# Altium PCB 00Key(1).PcbDoc (part 3 of 4)
Units mm, origin at the board's own origin, x right, y up, seen from the top; angles counter-clockwise.
Board outline 304.8 x 170.81 mm, 2 copper layers (F.Cu, B.Cu); 268 components, 236 nets, 1532 pads, 61 vias.
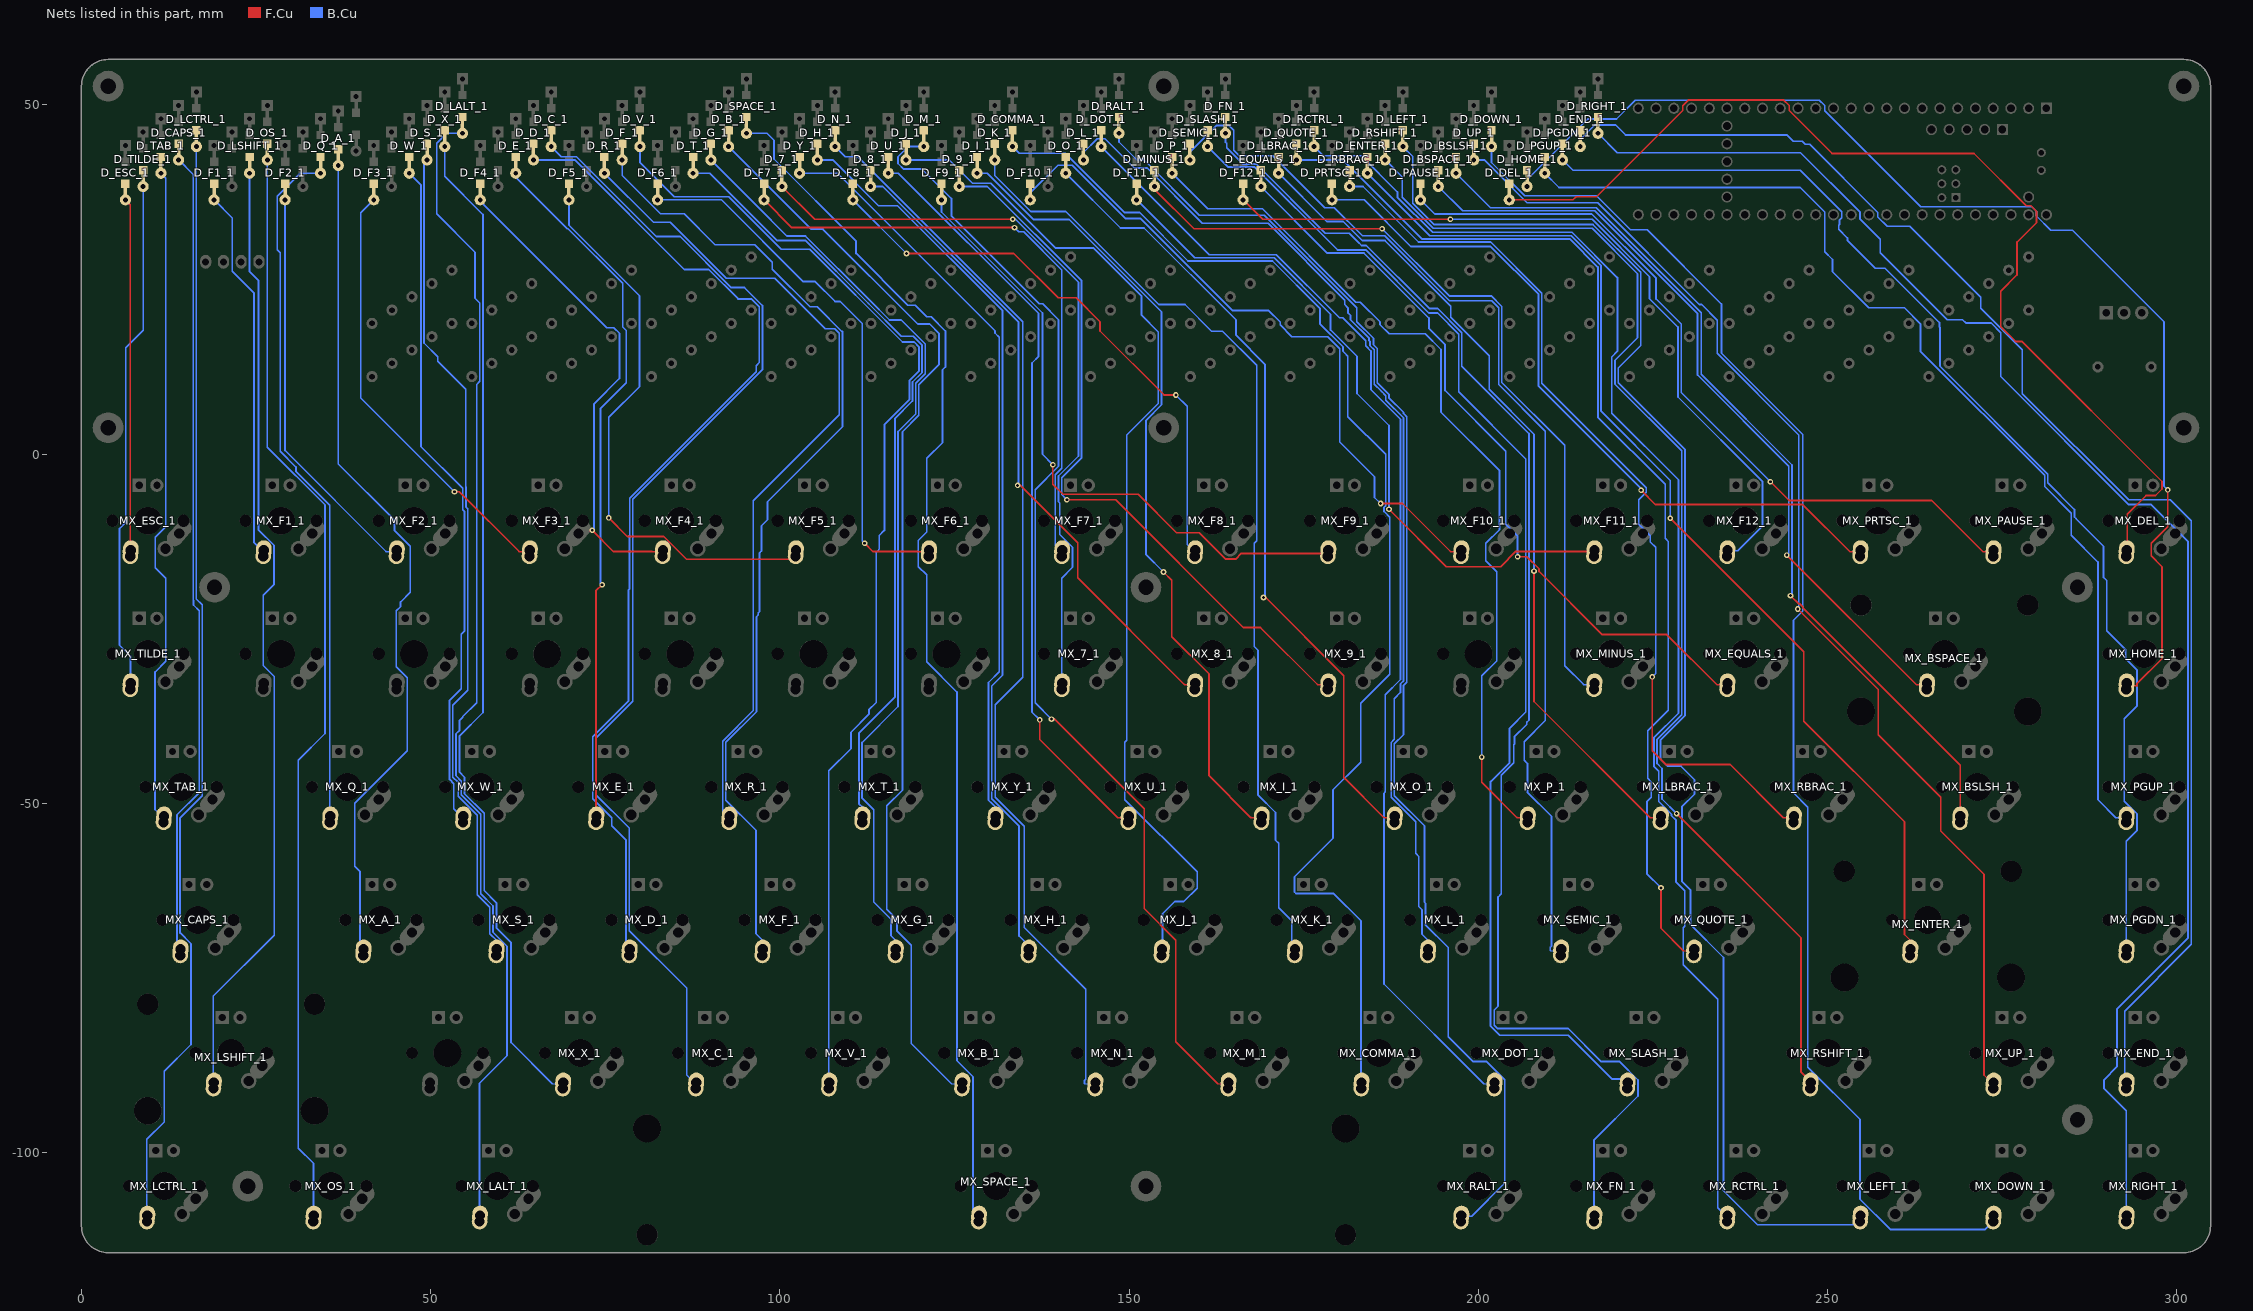
[diagram p3: the nets of this part, all layers, seen from the top]

## Via types
v1: diameter 0.8, hole 0.4, F.Cu to B.Cu, tented both sides, 61 vias

## Nets (pads, with @x,y where several pads share a name; then routed paths per layer and width w, separated by ;. In a path a pad name is that pad's centre, name@x,y a point inside that pad or via, vN(x,y) a via of type N, cw(c..) or ccw(c..) an arc to the next point about the centre after c; other vN are vias at no path point) (continued)
Net-(D_7_1-Pad2): D_7_1.2 MX_7_1.2 | length 111.5
  F.Cu w0.25: D_7_1.2@100.266,40.652 D_7_1.2@100.266,39.528 D_7_1.2@100.266,38.328 104.962,33.632 v1(133.336,33.632)
  B.Cu w0.25: v1(133.336,33.632) 133.717,33.632 142.73,24.619 142.73,-0.253 139.876,-3.107 139.876,-6.789 140.069,-6.983 140.069,-11.487 141.881,-13.299 141.881,-16.174 140.327,-17.729 140.327,-31.436 140.477,-31.586 140.374,-33.075 140.374,-33.614 MX_7_1.2@140.334,-33.654
Net-(D_8_1-Pad2): D_8_1.2 MX_8_1.2 | length 95.7
  F.Cu w0.25: D_8_1.2@112.966,38.328 D_8_1.2@112.966,39.528 D_8_1.2@112.966,40.652 ; v1(134.017,-4.456) 134.423,-4.456 142.615,-12.647 142.615,-17.688 157.896,-32.969 159.424,-33.075 159.384,-33.115 MX_8_1.2@159.384,-33.654
  B.Cu w0.25: D_8_1.2@112.966,38.328 114.724,38.328 134.16,18.891 134.16,-4.312 v1(134.017,-4.456)
Net-(D_9_1-Pad2): D_9_1.2 MX_9_1.2 | length 107.2
  F.Cu w0.25: D_9_1.2@125.666,38.328 D_9_1.2@125.666,39.528 D_9_1.2@125.666,40.652 ; v1(141.078,-6.512) 148.043,-6.512 166.329,-24.798 168.775,-24.798 176.946,-32.969 178.474,-33.075 178.434,-33.115 MX_9_1.2@178.434,-33.654
  B.Cu w0.25: D_9_1.2@125.666,38.328 129.667,38.328 143.18,24.814 143.18,-0.501 140.327,-3.355 140.327,-5.76 v1(141.078,-6.512)
Net-(D_A_1-Pad2): D_A_1.2 MX_A_1.2 | length 124.8
  F.Cu w0.25: D_A_1.2@36.767,41.343 D_A_1.2@36.767,42.543 D_A_1.2@36.767,43.667
  B.Cu w0.25: D_A_1.2@36.767,41.343 36.767,-1.404 44.825,-9.462 44.825,-10.937 47.062,-13.174 47.062,-19.776 45.685,-21.153 45.685,-21.789 45.077,-22.398 45.077,-30.428 46.642,-31.992 46.642,-42.465 39.123,-49.984 39.123,-58.984 39.864,-59.725 39.864,-70.676 40.362,-71.175 40.322,-71.215 MX_A_1.2@40.322,-71.754
Net-(D_B_1-Pad2): D_B_1.2 MX_B_1.2 | length 160
  F.Cu w0.25: D_B_1.2@92.647,44.043 D_B_1.2@92.647,45.243 D_B_1.2@92.647,46.367 ; MX_B_1.2@126.047,-90.804 126.087,-90.764 MX_B_1.2@126.087,-90.225
  B.Cu w0.25: D_B_1.2@92.647,44.043 104.458,32.231 106.145,32.231 119.737,18.639 121.416,18.639 122.78,17.275 122.78,12.863 119.879,9.962 119.879,5.581 117.534,3.236 117.534,-48.097 115.3,-50.331 115.3,-65.129 116.743,-66.572 116.743,-68.234 118.803,-70.294 118.803,-84.363 124.559,-90.119 MX_B_1.2@126.087,-90.225
Net-(D_BSLSH_1-Pad2): D_BSLSH_1.2 MX_BSLSH_1.2 | length 134.3
  F.Cu w0.25: D_BSLSH_1.2@196.786,40.233 D_BSLSH_1.2@196.786,41.433 D_BSLSH_1.2@196.786,42.557 ; v1(244.669,-20.232) 245.862,-21.425 246.011,-21.425 246.436,-21.85 246.436,-21.999 268.962,-44.526 268.962,-50.534 269.065,-50.636 268.962,-52.125 268.962,-52.664 MX_BSLSH_1.2@268.923,-52.704
  B.Cu w0.25: D_BSLSH_1.2@196.786,40.233 201.722,35.297 216.833,35.297 231.888,20.242 231.888,11.458 244.889,-1.543 244.889,-20.012 v1(244.669,-20.232)
Net-(D_BSPACE_1-Pad2): D_BSPACE_1.2 MX_BSPACE_1.2 | length 115.4
  F.Cu w0.25: D_BSPACE_1.2@194.246,38.328 D_BSPACE_1.2@194.246,39.528 D_BSPACE_1.2@194.246,40.652 ; v1(244.146,-14.443) 262.672,-32.969 MX_BSPACE_1.2@264.201,-33.075
  B.Cu w0.25: D_BSPACE_1.2@194.246,38.328 197.727,34.847 216.646,34.847 231.368,20.126 231.368,11.342 244.412,-1.702 244.412,-14.177 v1(244.146,-14.443) ; MX_BSPACE_1.2@264.161,-33.654 264.161,-33.115 MX_BSPACE_1.2@264.201,-33.075
Net-(D_C_1-Pad2): D_C_1.2 MX_C_1.2 | length 169.9
  F.Cu w0.25: D_C_1.2@67.246,44.043 D_C_1.2@67.246,45.243 D_C_1.2@67.246,46.367 ; MX_C_1.2@87.947,-90.804 87.947,-90.265 MX_C_1.2@87.987,-90.225
  B.Cu w0.25: D_C_1.2@67.246,44.043 68.701,42.588 70.861,42.588 82.279,31.171 85.709,31.171 93.022,23.858 94.92,23.858 97.486,21.292 97.486,12.084 78.939,-6.462 78.939,-35.343 73.642,-40.641 73.642,-48.734 78.415,-53.507 78.415,-68.199 86.638,-76.422 86.638,-88.875 MX_C_1.2@87.987,-90.225
Net-(D_CAPS_1-Pad2): D_CAPS_1.2 MX_CAPS_1.2 | length 119
  F.Cu w0.25: D_CAPS_1.2@13.906,42.138 D_CAPS_1.2@13.906,43.338 D_CAPS_1.2@13.906,44.462
  B.Cu w0.25: D_CAPS_1.2@13.906,42.138 15.996,40.048 15.996,-20.907 16.035,-20.946 16.035,-21.583 16.844,-22.392 16.844,-48.451 13.67,-51.624 13.67,-70.676 14.169,-71.175 14.129,-71.215 MX_CAPS_1.2@14.129,-71.754
Net-(D_COMMA_1-Pad2): D_COMMA_1.2 MX_COMMA_1.2 | length 184.8
  F.Cu w0.25: D_COMMA_1.2@133.286,44.043 D_COMMA_1.2@133.286,45.243 D_COMMA_1.2@133.286,46.367 ; MX_COMMA_1.2@183.197,-90.804 183.197,-90.265 MX_COMMA_1.2@183.237,-90.225
  B.Cu w0.25: D_COMMA_1.2@133.286,44.043 134.232,43.097 140.82,43.097 149.295,34.622 151.462,34.622 158.418,27.666 170.517,27.666 177.298,20.885 177.298,18.686 180.598,15.387 180.598,14.75 180.775,14.573 181.299,14.049 181.299,5.391 186.707,-0.017 186.707,-7.348 186.468,-7.588 186.468,-8.188 187.285,-9.005 187.285,-31.518 183.13,-35.673 183.13,-44.102 179.172,-48.059 179.172,-54.97 173.657,-60.486 173.657,-62.679 173.875,-62.897 179.259,-62.897 183.189,-66.828 183.189,-88.585 183.34,-88.736 MX_COMMA_1.2@183.237,-90.225
Net-(D_D_1-Pad2): D_D_1.2 MX_D_1.2 | length 148.3
  F.Cu w0.25: D_D_1.2@64.706,42.138 D_D_1.2@64.706,43.338 D_D_1.2@64.706,44.462
  B.Cu w0.25: D_D_1.2@64.706,42.138 70.592,42.138 86.286,26.444 89.799,26.444 94.002,22.24 95.9,22.24 97.036,21.105 97.036,13.133 96.585,12.683 96.585,11.821 78.489,-6.276 78.489,-11.561 78.448,-11.602 78.448,-19.295 78.298,-19.445 78.298,-35.347 73.191,-40.455 73.191,-49.309 75.927,-52.045 75.927,-53.213 77.964,-55.251 77.964,-70.676 78.462,-71.175 78.422,-71.215 MX_D_1.2@78.422,-71.754
Net-(D_DEL_1-Pad2): D_DEL_1.2 MX_DEL_1.2 | length 155.6
  F.Cu w0.25: D_DEL_1.2@204.406,38.747 D_DEL_1.2@204.406,37.623 D_DEL_1.2@204.406,36.423 213.523,36.423 213.973,36.873 216.899,36.873 229.234,49.208 229.234,49.903 230.033,50.702 243.703,50.702 244.474,49.93 244.474,49.205 250.622,43.058 270.945,43.058 278.443,35.56 279.099,35.56 279.89,34.769 279.89,33.165 277.1,30.375 277.1,25.674 274.774,23.347 274.774,18.256 276.877,16.153 277.803,16.153 297.862,-3.907 297.862,-4.975 296.926,-5.911 295.576,-5.911 292.877,-8.61 292.877,-12.536 292.774,-14.025 292.774,-14.564 MX_DEL_1.2@292.734,-14.604
Net-(D_DOT_1-Pad2): D_DOT_1.2 MX_DOT_1.2 | length 169.2
  F.Cu w0.25: D_DOT_1.2@145.987,44.043 D_DOT_1.2@145.987,45.243 D_DOT_1.2@145.987,46.367
  B.Cu w0.25: D_DOT_1.2@145.987,44.043 161.462,28.567 171.061,28.567 180.102,19.526 180.576,19.526 183.878,16.224 183.878,15.51 184.618,14.77 184.618,9.216 188.831,5.003 188.831,-32.247 186.655,-34.423 186.655,-48.341 186.475,-48.52 186.475,-75.835 200.759,-90.119 202.287,-90.225 202.287,-90.764 MX_DOT_1.2@202.248,-90.804
Net-(D_DOWN_1-Pad2): D_DOWN_1.2 MX_DOWN_1.2 | length 205.3
  F.Cu w0.25: D_DOWN_1.2@201.867,44.043 D_DOWN_1.2@201.867,45.243 D_DOWN_1.2@201.867,46.367
  B.Cu w0.25: D_DOWN_1.2@201.867,44.043 201.867,41.773 206.645,36.994 216.89,36.994 221.759,32.125 224.161,32.125 234.777,21.509 234.777,14.496 246.438,2.835 246.438,-22.449 245.103,-23.784 245.103,-48.459 247.154,-50.511 247.154,-87.755 254.627,-95.227 254.627,-106.672 258.934,-110.979 272.56,-110.979 MX_DOWN_1.2@273.684,-109.854 273.684,-109.315 MX_DOWN_1.2@273.724,-109.275
Net-(D_E_1-Pad2): D_E_1.2 MX_E_1.2 | length 104
  F.Cu w0.25: D_E_1.2@62.166,40.233 D_E_1.2@62.166,41.433 D_E_1.2@62.166,42.557 ; MX_E_1.2@73.661,-52.704 73.701,-52.664 73.701,-52.125 73.803,-50.636 73.649,-50.482 73.649,-19.564 v1(74.528,-18.685)
  B.Cu w0.25: D_E_1.2@62.166,40.233 62.166,39.675 69.543,32.298 69.654,32.298 77.487,24.465 77.487,18.218 77.992,17.713 77.992,10.226 74.292,6.525 74.292,-18.449 v1(74.528,-18.685)
Net-(D_END_1-Pad2): D_END_1.2 MX_END_1.2 | length 205.5
  F.Cu w0.25: D_END_1.2@214.566,44.043 D_END_1.2@214.566,45.243 D_END_1.2@214.566,46.367
  B.Cu w0.25: D_END_1.2@214.566,44.043 214.566,45.057 216.642,47.133 219.635,47.133 221.048,45.72 244.156,45.72 245.057,44.82 246.331,44.82 246.781,44.369 247.418,44.369 257.174,34.613 257.174,33.966 258.504,32.636 261.738,32.636 271.914,22.46 271.914,20.907 277.863,14.957 277.863,8.686 293.073,-6.524 299.054,-6.524 302.058,-9.528 302.058,-70.168 292.504,-79.721 292.504,-89.954 292.774,-90.225 292.774,-90.764 MX_END_1.2@292.734,-90.804
Net-(D_ENTER_1-Pad2): D_ENTER_1.2 MX_ENTER_1.2 | length 158.4
  F.Cu w0.25: D_ENTER_1.2@184.087,40.233 D_ENTER_1.2@184.087,41.433 D_ENTER_1.2@184.087,42.557 ; v1(227.454,-9.167) 246.576,-28.289 246.576,-38.212 260.987,-52.623 260.987,-68.752 261.921,-69.686 MX_ENTER_1.2@261.819,-71.175
  B.Cu w0.25: D_ENTER_1.2@184.087,40.233 193.041,31.278 213.259,31.278 217.548,26.989 217.548,6.142 227.454,-3.763 v1(227.454,-9.167) ; MX_ENTER_1.2@261.779,-71.754 261.779,-71.215 MX_ENTER_1.2@261.819,-71.175
Net-(D_EQUALS_1-Pad2): D_EQUALS_1.2 MX_EQUALS_1.2 | length 112
  F.Cu w0.25: D_EQUALS_1.2@168.846,38.328 D_EQUALS_1.2@168.846,39.528 D_EQUALS_1.2@168.846,40.652 ; v1(205.598,-14.689) 206.93,-14.689 208.675,-16.434 208.675,-16.786 217.706,-25.817 226.944,-25.817 234.096,-32.969 235.624,-33.075 235.624,-33.614 MX_EQUALS_1.2@235.584,-33.654
  B.Cu w0.25: D_EQUALS_1.2@168.846,38.328 178.373,28.801 183.613,28.801 192.9,19.513 192.9,18.024 195.223,15.702 195.223,9.127 203.904,0.446 203.904,-10.022 205.598,-11.716 v1(205.598,-14.689)
Net-(D_ESC_1-Pad2): D_ESC_1.2 MX_ESC_1.2 | length 53.7
  F.Cu w0.25: D_ESC_1.2@6.286,38.747 D_ESC_1.2@6.286,37.623 D_ESC_1.2@6.286,36.423 6.977,35.732 6.977,-12.386 7.128,-12.536 MX_ESC_1.2@7.025,-14.025
  B.Cu w0.25: MX_ESC_1.2@6.985,-14.604 6.985,-14.065 MX_ESC_1.2@7.025,-14.025
Net-(D_F1_1-Pad2): D_F1_1.2 MX_F1_1.2 | length 56.3
  F.Cu w0.25: D_F1_1.2@18.986,36.423 D_F1_1.2@18.986,37.623 D_F1_1.2@18.986,38.747
  B.Cu w0.25: D_F1_1.2@18.986,36.423 21.589,33.82 21.589,26.187 24.714,23.063 24.714,-12.649 26.075,-14.01 26.075,-14.025 26.075,-14.564 MX_F1_1.2@26.035,-14.604
Net-(D_F2_1-Pad2): D_F2_1.2 MX_F2_1.2 | length 60.8
  F.Cu w0.25: D_F2_1.2@29.146,36.423 D_F2_1.2@29.146,37.623 D_F2_1.2@29.146,38.747
  B.Cu w0.25: D_F2_1.2@29.146,36.423 29.146,0.531 43.597,-13.919 45.125,-14.025 45.085,-14.065 MX_F2_1.2@45.085,-14.604
Net-(D_F3_1-Pad2): D_F3_1.2 MX_F3_1.2 | length 65.4
  F.Cu w0.25: D_F3_1.2@41.846,36.423 D_F3_1.2@41.846,37.623 D_F3_1.2@41.846,38.747 ; v1(53.406,-5.369) 54.096,-5.369 62.646,-13.919 MX_F3_1.2@64.174,-14.025
  B.Cu w0.25: D_F3_1.2@41.846,36.423 39.987,34.563 39.987,8.05 v1(53.406,-5.369) ; MX_F3_1.2@64.134,-14.604 64.134,-14.065 MX_F3_1.2@64.174,-14.025
Net-(D_F4_1-Pad2): D_F4_1.2 MX_F4_1.2 | length 72.1
  F.Cu w0.25: D_F4_1.2@57.087,36.423 D_F4_1.2@57.087,37.623 D_F4_1.2@57.087,38.747 ; v1(73.116,-10.888) 76.146,-13.919 81.696,-13.919 MX_F4_1.2@83.224,-14.025
  B.Cu w0.25: D_F4_1.2@57.087,36.423 57.087,36.211 75.175,18.123 76.219,18.123 77.031,17.311 77.031,10.857 73.391,7.217 73.391,-10.613 v1(73.116,-10.888) ; MX_F4_1.2@83.184,-14.604 83.184,-14.065 MX_F4_1.2@83.224,-14.025
Net-(D_F5_1-Pad2): D_F5_1.2 MX_F5_1.2 | length 83.8
  F.Cu w0.25: D_F5_1.2@69.787,36.423 D_F5_1.2@69.787,37.623 D_F5_1.2@69.787,38.747 ; v1(75.49,-9.119) 78.155,-11.785 83.371,-11.785 86.623,-15.036 101.803,-15.036 MX_F5_1.2@102.234,-14.604 102.234,-14.065 MX_F5_1.2@102.274,-14.025
  B.Cu w0.25: D_F5_1.2@69.787,36.423 69.787,32.803 79.891,22.698 79.891,9.679 75.49,5.277 v1(75.49,-9.119)
Net-(D_F6_1-Pad2): D_F6_1.2 MX_F6_1.2 | length 80.8
  F.Cu w0.25: D_F6_1.2@82.486,36.423 D_F6_1.2@82.486,37.623 D_F6_1.2@82.486,38.747 ; v1(112.117,-12.733) 113.304,-13.919 119.796,-13.919 MX_F6_1.2@121.324,-14.025
  B.Cu w0.25: D_F6_1.2@82.486,36.423 91.625,36.423 103.332,24.715 105.039,24.715 107.886,21.868 108.639,21.868 111.795,18.712 111.795,-12.41 v1(112.117,-12.733) ; MX_F6_1.2@121.284,-14.604 121.284,-14.065 MX_F6_1.2@121.324,-14.025
Net-(D_F7_1-Pad2): D_F7_1.2 MX_F7_1.2 | length 90.9
  F.Cu w0.25: D_F7_1.2@97.727,38.747 D_F7_1.2@97.727,37.623 D_F7_1.2@97.727,36.423 101.705,32.444 v1(133.577,32.444)
  B.Cu w0.25: v1(133.577,32.444) 134.18,31.84 134.871,31.84 140.332,26.38 140.332,-2.015 139.408,-2.938 139.408,-13.058 140.374,-14.025 140.374,-14.564 MX_F7_1.2@140.334,-14.604
Net-(D_F8_1-Pad2): D_F8_1.2 MX_F8_1.2 | length 85.2
  F.Cu w0.25: D_F8_1.2@110.426,36.423 D_F8_1.2@110.426,37.623 D_F8_1.2@110.426,38.747 ; v1(118.108,28.741) 133.472,28.741 139.822,22.391 142.404,22.391 145.823,18.973 145.823,17.643 154.99,8.475 v1(156.677,8.475)
  B.Cu w0.25: D_F8_1.2@110.426,36.423 v1(118.108,28.741) ; v1(156.677,8.475) 158.3,6.852 158.3,-12.93 MX_F8_1.2@159.394,-14.025 ; MX_F8_1.2@159.384,-14.604 159.384,-14.035 MX_F8_1.2@159.394,-14.025 ; MX_F8_1.2@159.424,-14.025 MX_F8_1.2@159.394,-14.025
Net-(D_F9_1-Pad2): D_F9_1.2 MX_F9_1.2 | length 94.4
  F.Cu w0.25: D_F9_1.2@123.126,36.423 D_F9_1.2@123.126,37.623 D_F9_1.2@123.126,38.747 ; v1(139.067,-1.503) 139.067,-4.275 140.515,-5.723 151.264,-5.723 156.773,-11.232 160.047,-11.232 163.824,-15.009 165.239,-15.009 166.053,-14.195 178.111,-14.195 MX_F9_1.2@178.207,-14.292 ; MX_F9_1.2@178.434,-14.604 178.207,-14.377 MX_F9_1.2@178.207,-14.292 ; MX_F9_1.2@178.474,-14.025 MX_F9_1.2@178.207,-14.292
  B.Cu w0.25: D_F9_1.2@123.126,36.423 123.126,34.677 137.578,20.226 137.578,-0.014 v1(139.067,-1.503)
Net-(D_F10_1-Pad2): D_F10_1.2 MX_F10_1.2 | length 100
  F.Cu w0.25: D_F10_1.2@135.826,36.423 D_F10_1.2@135.826,37.623 D_F10_1.2@135.826,38.747 ; v1(185.982,-7.048) 189.125,-7.048 195.996,-13.919 MX_F10_1.2@197.524,-14.025
  B.Cu w0.25: D_F10_1.2@135.826,36.423 135.826,37.415 139.801,41.389 141.841,41.389 149.496,33.734 151.637,33.734 164.802,20.57 169.972,20.57 171.609,18.933 171.609,18.512 173.29,16.832 178.435,16.832 180.147,15.12 180.147,1.759 185.121,-3.214 185.121,-6.187 v1(185.982,-7.048) ; MX_F10_1.2@197.484,-14.604 197.484,-14.065 MX_F10_1.2@197.524,-14.025
Net-(D_F11_1-Pad2): D_F11_1.2 MX_F11_1.2 | length 102.6
  F.Cu w0.25: D_F11_1.2@151.066,36.423 D_F11_1.2@151.066,37.623 D_F11_1.2@151.066,38.747 ; v1(187.194,-7.888) 195.397,-16.092 203.17,-16.092 205.35,-13.912 215.842,-13.912 MX_F11_1.2@216.265,-14.335 ; MX_F11_1.2@216.534,-14.604 MX_F11_1.2@216.265,-14.335 ; MX_F11_1.2@216.574,-14.025 MX_F11_1.2@216.265,-14.335
  B.Cu w0.25: D_F11_1.2@151.066,36.423 159.373,28.116 170.741,28.116 178.819,20.038 178.819,17.802 182.605,14.016 182.605,8.701 187.194,4.112 v1(187.194,-7.888)
Net-(D_F12_1-Pad2): D_F12_1.2 MX_F12_1.2 | length 114.6
  F.Cu w0.25: D_F12_1.2@166.306,38.747 D_F12_1.2@166.306,37.623 D_F12_1.2@166.306,36.423 169.093,33.636 v1(195.975,33.636)
  B.Cu w0.25: v1(195.975,33.636) 216.265,33.636 224.483,25.418 224.483,22.284 228.566,18.201 228.566,8.192 240.672,-3.915 240.672,-10.262 237.113,-13.821 235.828,-13.821 235.624,-14.025 235.584,-14.065 MX_F12_1.2@235.584,-14.604
Net-(D_F_1-Pad2): D_F_1.2 MX_F_1.2 | length 144.4
  F.Cu w0.25: D_F_1.2@77.406,42.138 D_F_1.2@77.406,43.338 D_F_1.2@77.406,44.462
  B.Cu w0.25: D_F_1.2@77.406,42.138 77.406,39.907 82.891,34.422 86.269,34.422 90.689,30.003 96.362,30.003 98.892,27.473 98.892,26.502 104.29,21.105 105.338,21.105 108.881,17.563 108.947,17.563 108.947,3.946 98.212,-6.789 98.212,-9.36 97.35,-10.222 97.35,-10.896 97.35,-13.835 97.083,-14.102 97.083,-22.505 96.899,-22.689 96.899,-22.981 96.633,-23.248 96.633,-36.865 92.248,-41.25 92.248,-49.529 96.564,-53.845 96.564,-68.635 97.615,-69.686 97.512,-71.175 97.512,-71.714 MX_F_1.2@97.472,-71.754
Net-(D_FN_1-Pad2): D_FN_1.2 MX_FN_1.2 | length 201.1
  F.Cu w0.25: D_FN_1.2@163.766,45.948 D_FN_1.2@163.766,47.148 D_FN_1.2@163.766,48.272
  B.Cu w0.25: D_FN_1.2@163.766,45.948 163.766,44.683 163.954,44.496 163.954,43.859 166.25,41.563 168.146,41.563 178.088,31.622 181.482,31.622 182.765,30.338 182.81,30.338 183.257,29.891 183.939,29.891 192.95,20.88 194.125,20.88 197.613,17.392 197.613,12.572 207.224,2.961 207.224,-38.046 206.926,-38.344 206.926,-38.643 206.916,-38.653 206.916,-38.683 205.146,-40.454 205.146,-41.506 205.065,-41.587 205.065,-44.17 203.261,-45.974 203.261,-62.943 202.81,-63.393 202.81,-78.986 202.24,-79.557 202.24,-81.736 202.705,-82.201 212.807,-82.201 217.557,-86.951 220.202,-86.951 222.841,-89.59 222.841,-91.876 216.527,-98.19 216.527,-109.227 216.574,-109.275 216.574,-109.814 MX_FN_1.2@216.534,-109.854
Net-(D_G_1-Pad2): D_G_1.2 MX_G_1.2 | length 137.3
  F.Cu w0.25: D_G_1.2@90.106,42.138 D_G_1.2@90.106,43.338 D_G_1.2@90.106,44.462 ; MX_G_1.2@116.522,-71.754 116.522,-71.215 MX_G_1.2@116.562,-71.175
  B.Cu w0.25: D_G_1.2@90.106,42.138 96.602,35.642 100.993,31.251 103.641,31.251 112.86,22.032 115.681,19.21 117.365,19.21 120.792,15.783 120.792,11.511 119.429,10.149 119.429,5.767 116.901,3.238 116.901,-36.118 111.752,-41.267 111.752,-49.249 113.426,-50.923 113.426,-64.11 115.897,-66.581 115.897,-68.918 116.665,-69.686 MX_G_1.2@116.562,-71.175
Net-(D_H_1-Pad2): D_H_1.2 MX_H_1.2 | length 133
  F.Cu w0.25: D_H_1.2@105.346,42.138 D_H_1.2@105.346,43.338 D_H_1.2@105.346,44.462 ; MX_H_1.2@135.572,-71.754 135.572,-71.215 MX_H_1.2@135.612,-71.175
  B.Cu w0.25: D_H_1.2@105.346,42.138 107.55,42.138 114.1,35.588 116.817,35.588 131.873,20.532 131.873,-31.605 130.299,-33.178 130.299,-49.345 134.233,-53.279 134.233,-68.967 135.612,-70.347 MX_H_1.2@135.612,-71.175
Net-(D_HOME_1-Pad2): D_HOME_1.2 MX_HOME_1.2 | length 170.7
  F.Cu w0.25: D_HOME_1.2@206.946,38.328 D_HOME_1.2@206.946,39.528 D_HOME_1.2@206.946,40.652 ; MX_HOME_1.2@292.774,-33.075 294.263,-33.177 294.263,-32.882 297.849,-29.296 297.849,-16.097 296.298,-14.545 296.298,-12.767 298.687,-10.377 v1(298.687,-5.1)
  B.Cu w0.25: D_HOME_1.2@206.946,38.328 206.946,39.284 215.657,47.994 219.758,47.994 222.438,50.675 248.808,50.675 249.554,49.929 249.554,49.202 263.342,35.415 279.24,35.415 279.89,34.766 279.89,34.111 281.935,32.067 285.04,32.067 298.144,18.963 298.144,-4.556 v1(298.687,-5.1) ; MX_HOME_1.2@292.734,-33.654 292.734,-33.115 MX_HOME_1.2@292.774,-33.075
Net-(D_I_1-Pad2): D_I_1.2 MX_I_1.2 | length 118.6
  F.Cu w0.25: D_I_1.2@128.207,40.233 D_I_1.2@128.207,41.433 D_I_1.2@128.207,42.557 ; v1(154.903,-16.856) 156.094,-18.046 156.094,-26.126 161.429,-31.461 161.429,-46.025 167.422,-52.019 MX_I_1.2@168.951,-52.125
  B.Cu w0.25: D_I_1.2@128.207,40.233 129.672,40.233 136.286,33.619 141.384,33.619 154.612,20.391 154.612,7.071 152.413,4.871 152.413,-14.365 v1(154.903,-16.856) ; MX_I_1.2@168.911,-52.704 168.911,-52.165 MX_I_1.2@168.951,-52.125
Net-(D_J_1-Pad2): D_J_1.2 MX_J_1.2 | length 148.6
  F.Cu w0.25: D_J_1.2@118.046,42.138 D_J_1.2@118.046,43.338 D_J_1.2@118.046,44.462
  B.Cu w0.25: D_J_1.2@118.046,42.138 124.202,42.138 127.556,38.783 130.166,38.783 139.414,29.535 144.831,29.535 151.769,22.597 151.769,19.895 154.162,17.502 154.162,7.257 149.651,2.747 149.651,-40.929 149.37,-41.21 149.37,-49.438 159.728,-59.797 159.728,-62.124 157.819,-64.033 156.523,-64.033 154.765,-65.791 154.765,-69.686 154.662,-71.175 154.623,-71.215 MX_J_1.2@154.623,-71.754
Net-(D_K_1-Pad2): D_K_1.2 MX_K_1.2 | length 140.4
  F.Cu w0.25: D_K_1.2@130.746,42.138 D_K_1.2@130.746,43.338 D_K_1.2@130.746,44.462 ; MX_K_1.2@173.672,-71.754 173.672,-71.215 MX_K_1.2@173.712,-71.175
  B.Cu w0.25: D_K_1.2@130.746,42.138 130.746,39.911 135.908,34.749 140.891,34.749 154.209,21.431 157.975,21.431 161.785,17.621 163.358,17.621 168.249,12.729 168.249,-12.404 167.913,-12.74 167.913,-27.52 168.438,-28.044 168.438,-48.156 168.445,-48.163 168.445,-48.8 170.937,-51.292 170.937,-55.241 171.388,-55.691 171.388,-64.914 173.262,-66.789 173.262,-70.724 MX_K_1.2@173.712,-71.175
Net-(D_L_1-Pad2): D_L_1.2 MX_L_1.2 | length 151.5
  F.Cu w0.25: D_L_1.2@143.446,42.138 D_L_1.2@143.446,43.338 D_L_1.2@143.446,44.462
  B.Cu w0.25: D_L_1.2@143.446,42.138 143.446,43.2 145.421,45.174 146.533,45.174 150.735,40.972 152.554,40.972 160.473,33.052 169.875,33.052 180.858,22.069 180.858,21.432 181.308,20.982 181.308,20.25 181.676,19.883 181.676,19.246 184.342,16.58 184.342,16.262 184.453,16.151 184.453,15.572 185.068,14.957 185.068,10.04 186.124,8.984 186.723,8.385 186.723,7.748 189.281,5.19 189.281,-32.434 188.831,-32.883 188.831,-34.101 187.953,-34.98 187.953,-40.791 187.728,-41.016 187.728,-41.046 187.502,-41.271 187.502,-49.126 191.009,-52.633 191.009,-57.141 191.46,-57.592 191.46,-64.753 191.91,-65.203 191.91,-68.731 192.865,-69.686 192.762,-71.175 192.762,-71.714 MX_L_1.2@192.722,-71.754
Net-(D_LALT_1-Pad2): D_LALT_1.2 MX_LALT_1.2 | length 169.7
  F.Cu w0.25: D_LALT_1.2@54.546,45.948 D_LALT_1.2@54.546,47.148 D_LALT_1.2@54.546,48.272
  B.Cu w0.25: D_LALT_1.2@54.546,45.948 52.254,45.948 50.844,44.537 50.844,34.404 56.33,28.918 56.33,22.346 57.027,21.65 57.027,10.438 56.576,9.987 56.576,-35.554 54.584,-37.546 54.584,-37.64 54.134,-38.09 54.134,-39.514 53.618,-40.029 53.618,-46.031 54.381,-46.793 54.381,-48.772 57.158,-51.549 57.158,-62.911 58.916,-64.67 58.916,-68.447 60.926,-70.456 60.926,-86.107 56.983,-90.049 56.983,-109.227 57.031,-109.275 56.991,-109.315 MX_LALT_1.2@56.991,-109.854
Net-(D_LBRAC_1-Pad2): D_LBRAC_1.2 MX_LBRAC_1.2 | length 122
  F.Cu w0.25: D_LBRAC_1.2@171.386,40.233 D_LBRAC_1.2@171.386,41.433 D_LBRAC_1.2@171.386,42.557 ; v1(207.95,-16.735) 207.95,-35.397 224.572,-52.019 226.101,-52.125 226.101,-52.664 MX_LBRAC_1.2@226.061,-52.704
  B.Cu w0.25: D_LBRAC_1.2@171.386,40.233 178.292,33.327 180.629,33.327 183.354,30.602 186.607,30.602 196.037,21.171 196.037,19.604 201.544,14.098 201.544,9.278 207.95,2.872 v1(207.95,-16.735)
Net-(D_LCTRL_1-Pad2): D_LCTRL_1.2 MX_LCTRL_1.2 | length 161.2
  F.Cu w0.25: D_LCTRL_1.2@16.447,44.043 D_LCTRL_1.2@16.447,45.243 D_LCTRL_1.2@16.447,46.367
  B.Cu w0.25: MX_LCTRL_1.2@9.366,-109.854 9.406,-109.814 9.406,-109.275 9.358,-109.227 9.358,-98.091 11.843,-95.606 11.843,-88.33 15.677,-84.496 15.677,-70.084 14.121,-68.528 14.121,-52.057 17.294,-48.883 17.294,-21.568 16.447,-20.721 D_LCTRL_1.2@16.447,44.043
Net-(D_LEFT_1-Pad2): D_LEFT_1.2 MX_LEFT_1.2 | length 214.7
  F.Cu w0.25: D_LEFT_1.2@189.166,44.043 D_LEFT_1.2@189.166,45.243 D_LEFT_1.2@189.166,46.367
  B.Cu w0.25: D_LEFT_1.2@189.166,44.043 190.581,42.628 190.581,35.939 193.645,32.876 216.388,32.876 223.222,26.042 223.222,15.575 219.996,12.348 219.996,10.25 229.55,0.695 229.55,-37.456 226.046,-40.959 226.046,-43.633 227.058,-44.645 228.99,-44.645 230.931,-46.586 230.931,-48.677 229.126,-50.482 229.126,-61.153 230.337,-62.365 230.337,-67.302 235.08,-72.045 235.08,-105.421 239.952,-110.293 254.196,-110.293 MX_LEFT_1.2@254.634,-109.854 254.634,-109.315 MX_LEFT_1.2@254.674,-109.275
Net-(D_LSHIFT_1-Pad2): D_LSHIFT_1.2 MX_LSHIFT_1.2 | length 139.8
  F.Cu w0.25: D_LSHIFT_1.2@24.066,40.233 D_LSHIFT_1.2@24.066,41.433 D_LSHIFT_1.2@24.066,42.557
  B.Cu w0.25: MX_LSHIFT_1.2@18.891,-90.804 18.931,-90.764 18.931,-90.225 18.88,-90.173 18.88,-77.566 27.59,-68.856 27.59,-31.82 26.012,-30.242 26.012,-20.188 27.571,-18.629 27.571,-13.065 25.325,-10.819 25.325,24.889 24.066,26.147 D_LSHIFT_1.2@24.066,40.233
Net-(D_M_1-Pad2): D_M_1.2 MX_M_1.2 | length 165.3
  F.Cu w0.25: D_M_1.2@120.587,44.043 D_M_1.2@120.587,45.243 D_M_1.2@120.587,46.367 ; v1(138.866,-37.917) 139.311,-37.917 152.14,-50.746 152.14,-65.035 156.666,-69.561 156.666,-84.126 162.659,-90.119 164.187,-90.225 164.147,-90.265 MX_M_1.2@164.147,-90.804
  B.Cu w0.25: D_M_1.2@120.587,44.043 118.334,44.043 116.892,42.6 116.892,41.628 117.699,40.82 120.328,40.82 124.541,36.608 124.541,34.134 137.122,21.552 137.593,21.552 139.881,19.264 139.881,-1.715 136.531,-5.065 136.531,-35.583 v1(138.866,-37.917)
Net-(D_MINUS_1-Pad2): D_MINUS_1.2 MX_MINUS_1.2 | length 120.5
  F.Cu w0.25: D_MINUS_1.2@153.606,40.652 D_MINUS_1.2@153.606,39.528 D_MINUS_1.2@153.606,38.328 153.606,37.952 159.27,32.288 v1(186.194,32.288)
  B.Cu w0.25: v1(186.194,32.288) 195.819,22.663 201.841,22.663 203.345,21.159 203.345,10.27 212.344,1.271 212.344,-30.267 215.046,-32.969 216.574,-33.075 216.534,-33.115 MX_MINUS_1.2@216.534,-33.654
Net-(D_N_1-Pad2): D_N_1.2 MX_N_1.2 | length 157.9
  F.Cu w0.25: D_N_1.2@107.886,44.043 D_N_1.2@107.886,45.243 D_N_1.2@107.886,46.367
  B.Cu w0.25: D_N_1.2@107.886,44.043 109.341,42.588 111.124,42.588 134.742,18.97 134.742,-31.938 130.803,-35.877 130.803,-49.118 134.968,-53.284 134.968,-67.753 143.788,-76.572 143.788,-89.47 143.609,-89.648 143.609,-90.119 145.137,-90.225 145.097,-90.265 MX_N_1.2@145.097,-90.804
Net-(D_O_1-Pad2): D_O_1.2 MX_O_1.2 | length 117.9
  F.Cu w0.25: D_O_1.2@140.906,40.233 D_O_1.2@140.906,41.433 D_O_1.2@140.906,42.557 ; v1(169.222,-20.515) 169.533,-20.515 180.715,-31.697 180.715,-46.262 186.472,-52.019 188.001,-52.125 188.001,-52.664 MX_O_1.2@187.961,-52.704
  B.Cu w0.25: D_O_1.2@140.906,40.233 148.744,32.395 152.111,32.395 165.295,19.212 165.295,17.025 169.428,12.893 169.428,-20.31 v1(169.222,-20.515)
Net-(D_OS_1-Pad2): D_OS_1.2 MX_OS_1.2 | length 160.2
  F.Cu w0.25: D_OS_1.2@26.607,42.138 D_OS_1.2@26.607,43.338 D_OS_1.2@26.607,44.462 ; MX_OS_1.2@33.179,-109.854 33.179,-109.315 MX_OS_1.2@33.219,-109.275
  B.Cu w0.25: D_OS_1.2@26.607,42.138 26.607,0.999 34.856,-7.251 34.856,-39.98 31.043,-43.793 31.043,-99.345 33.219,-101.521 33.219,-107.514 MX_OS_1.2@33.219,-109.275
Net-(D_P_1-Pad2): D_P_1.2 MX_P_1.2 | length 128.6
  F.Cu w0.25: D_P_1.2@156.147,40.233 D_P_1.2@156.147,41.433 D_P_1.2@156.147,42.557 ; v1(200.479,-43.36) 200.479,-46.976 205.522,-52.019 207.051,-52.125 207.051,-52.664 MX_P_1.2@207.011,-52.704
  B.Cu w0.25: D_P_1.2@156.147,40.233 161.251,35.128 169.073,35.128 182.444,21.757 183.089,21.757 185.896,18.951 185.896,18.538 187.2,17.234 192.389,17.234 194.628,14.995 194.628,6.014 203.024,-2.381 203.024,-10.776 201.044,-12.756 201.044,-15.266 202.614,-16.836 202.614,-29.599 200.479,-31.734 v1(200.479,-43.36)
Net-(D_PAUSE_1-Pad2): D_PAUSE_1.2 MX_PAUSE_1.2 | length 113.3
  F.Cu w0.25: D_PAUSE_1.2@191.707,36.423 D_PAUSE_1.2@191.707,37.623 D_PAUSE_1.2@191.707,38.747 ; v1(241.799,-3.946) 244.471,-6.617 264.894,-6.617 272.196,-13.919 MX_PAUSE_1.2@273.724,-14.025
  B.Cu w0.25: D_PAUSE_1.2@191.707,36.423 193.733,34.396 216.211,34.396 225.425,25.182 225.425,22.229 229.016,18.638 229.016,8.837 v1(241.799,-3.946) ; MX_PAUSE_1.2@273.684,-14.604 273.684,-14.065 MX_PAUSE_1.2@273.724,-14.025
Net-(D_PGDN_1-Pad2): D_PGDN_1.2 MX_PGDN_1.2 | length 172.7
  F.Cu w0.25: D_PGDN_1.2@212.026,42.138 D_PGDN_1.2@212.026,43.338 D_PGDN_1.2@212.026,44.462
  B.Cu w0.25: D_PGDN_1.2@212.026,42.138 213.524,40.64 246.073,40.64 251.995,34.718 251.995,33.846 251.669,33.52 251.669,32.898 251.568,32.797 251.568,32.196 252.813,30.951 252.813,30.637 256.805,26.645 258.203,26.645 265.984,18.864 265.984,18.249 266.065,18.168 266.065,12.592 281.504,-2.847 281.504,-4.108 285.315,-7.919 285.315,-8.982 285.54,-9.207 285.54,-9.224 289.483,-13.167 289.483,-17.632 289.933,-18.083 289.933,-25.254 292.619,-27.94 292.619,-28.346 292.677,-28.404 292.677,-29.272 294.266,-30.86 294.266,-36.074 292.466,-37.874 292.466,-49.687 294.292,-51.512 294.292,-53.829 292.727,-55.394 292.727,-71.127 292.774,-71.175 292.734,-71.215 MX_PGDN_1.2@292.734,-71.754
Net-(D_PGUP_1-Pad2): D_PGUP_1.2 MX_PGUP_1.2 | length 153.8
  F.Cu w0.25: D_PGUP_1.2@209.486,40.233 D_PGUP_1.2@209.486,41.433 D_PGUP_1.2@209.486,42.557
  B.Cu w0.25: D_PGUP_1.2@209.486,40.233 211.532,38.187 246.045,38.187 249.554,34.677 249.554,29 250.679,27.875 250.679,26.147 255.85,20.976 260.986,20.976 263.27,18.691 263.27,14.75 281.053,-3.033 281.053,-4.613 284.865,-8.424 284.865,-11.607 288.699,-15.441 288.699,-49.472 291.246,-52.019 292.774,-52.125 292.734,-52.165 MX_PGUP_1.2@292.734,-52.704
Net-(D_PRTSC_1-Pad2): D_PRTSC_1.2 MX_PRTSC_1.2 | length 107.3
  F.Cu w0.25: D_PRTSC_1.2@179.006,36.423 D_PRTSC_1.2@179.006,37.623 D_PRTSC_1.2@179.006,38.747 ; v1(223.279,-5.147) 225.337,-7.205 246.432,-7.205 253.146,-13.919 MX_PRTSC_1.2@254.674,-14.025
  B.Cu w0.25: D_PRTSC_1.2@179.006,36.423 183.637,36.423 190.331,29.729 201.762,29.729 208.609,22.882 208.609,9.735 223.279,-4.935 v1(223.279,-5.147) ; MX_PRTSC_1.2@254.634,-14.604 254.634,-14.065 MX_PRTSC_1.2@254.674,-14.025
Net-(D_Q_1-Pad2): D_Q_1.2 MX_Q_1.2 | length 102.7
  F.Cu w0.25: D_Q_1.2@34.227,40.233 D_Q_1.2@34.227,41.433 D_Q_1.2@34.227,42.557
  B.Cu w0.25: D_Q_1.2@34.227,40.233 31.32,40.233 28.018,36.931 28.018,29.292 28.469,28.841 28.469,0.411 30.698,-1.819 30.698,-2.456 35.552,-7.31 35.552,-52.077 35.6,-52.125 35.6,-52.664 MX_Q_1.2@35.56,-52.704
Net-(D_QUOTE_1-Pad2): D_QUOTE_1.2 MX_QUOTE_1.2 | length 159.9
  F.Cu w0.25: D_QUOTE_1.2@173.927,42.138 D_QUOTE_1.2@173.927,43.338 D_QUOTE_1.2@173.927,44.462 ; v1(226.129,-62.083) 226.129,-67.864 229.334,-71.069 230.862,-71.175 230.862,-71.714 MX_QUOTE_1.2@230.822,-71.754
  B.Cu w0.25: D_QUOTE_1.2@173.927,42.138 180.59,42.138 191.9,30.827 213.068,30.827 217.098,26.797 217.098,5.319 226.729,-4.312 226.729,-12.05 227.172,-12.492 227.172,-36.65 224.216,-39.605 224.216,-46.398 224.748,-46.931 224.748,-49.104 224.112,-49.74 224.112,-60.066 v1(226.129,-62.083)
Net-(D_R_1-Pad2): D_R_1.2 MX_R_1.2 | length 122.8
  F.Cu w0.25: D_R_1.2@74.867,40.233 D_R_1.2@74.867,41.433 D_R_1.2@74.867,42.557
  B.Cu w0.25: D_R_1.2@74.867,40.233 81.884,33.215 84.302,33.215 92.324,25.193 99.273,25.193 106.505,17.961 107.846,17.961 108.469,17.338 108.469,5.646 96.183,-6.641 96.183,-36.679 91.798,-41.063 91.798,-51.172 92.751,-52.125 92.711,-52.165 MX_R_1.2@92.711,-52.704
Net-(D_RALT_1-Pad2): D_RALT_1.2 MX_RALT_1.2 | length 193
  F.Cu w0.25: D_RALT_1.2@148.526,45.948 D_RALT_1.2@148.526,47.148 D_RALT_1.2@148.526,48.272 ; MX_RALT_1.2@197.484,-109.854 197.484,-109.315 MX_RALT_1.2@197.524,-109.275
  B.Cu w0.25: D_RALT_1.2@148.526,45.948 148.526,44.702 151.035,42.194 152.056,42.194 160.023,34.227 169.337,34.227 182.577,20.987 182.577,18.982 184.969,16.59 184.969,15.693 185.519,15.143 185.519,10.226 186.574,9.171 187.173,8.571 187.173,8.089 189.282,5.981 189.282,5.826 189.731,5.376 189.731,-32.62 189.282,-33.07 189.282,-40.128 187.953,-41.457 187.953,-48.877 192.264,-53.188 192.264,-64.152 192.401,-64.288 192.401,-67.349 195.673,-70.621 195.673,-83.395 199.226,-86.948 201.173,-86.948 203.768,-89.543 203.768,-104.327 199.013,-109.082 197.717,-109.082 MX_RALT_1.2@197.524,-109.275
Net-(D_RBRAC_1-Pad2): D_RBRAC_1.2 MX_RBRAC_1.2 | length 134.4
  F.Cu w0.25: D_RBRAC_1.2@181.546,38.328 D_RBRAC_1.2@181.546,39.528 D_RBRAC_1.2@181.546,40.652 ; v1(224.882,-31.88) 224.882,-42.47 226.816,-44.405 236.008,-44.405 243.622,-52.019 MX_RBRAC_1.2@245.151,-52.125
  B.Cu w0.25: D_RBRAC_1.2@181.546,38.328 183.459,38.328 191.409,30.377 201.751,30.377 209.059,23.069 209.059,10.173 224.004,-4.772 224.004,-5.447 222.954,-6.497 222.954,-10.022 224.608,-11.676 224.608,-12.57 225.37,-13.332 225.37,-31.392 v1(224.882,-31.88) ; MX_RBRAC_1.2@245.111,-52.704 245.111,-52.165 MX_RBRAC_1.2@245.151,-52.125
Net-(D_RCTRL_1-Pad2): D_RCTRL_1.2 MX_RCTRL_1.2 | length 199.4
  F.Cu w0.25: D_RCTRL_1.2@176.466,44.043 D_RCTRL_1.2@176.466,45.243 D_RCTRL_1.2@176.466,46.367
  B.Cu w0.25: D_RCTRL_1.2@176.466,44.043 177.785,42.724 183.217,42.724 188.395,37.547 188.395,36.815 193.427,31.782 213.391,31.782 219.887,25.287 219.887,14.738 219.076,13.927 219.076,5.888 228.635,-3.671 228.635,-37.056 225.116,-40.575 225.116,-44.69 225.821,-45.395 225.821,-49.716 227.64,-51.534 227.64,-51.748 228.287,-52.395 ; 228.287,-52.395 228.287,-61.27 229.515,-62.498 229.515,-67.574 229.308,-67.78 229.308,-73.078 234.246,-78.016 234.246,-107.896 235.624,-109.275 235.624,-109.814 MX_RCTRL_1.2@235.584,-109.854
Net-(D_RIGHT_1-Pad2): D_RIGHT_1.2 MX_RIGHT_1.2 | length 220.1
  F.Cu w0.25: D_RIGHT_1.2@217.106,45.948 D_RIGHT_1.2@217.106,47.148 D_RIGHT_1.2@217.106,48.272 ; MX_RIGHT_1.2@292.734,-109.854 292.734,-109.315 MX_RIGHT_1.2@292.774,-109.275
  B.Cu w0.25: D_RIGHT_1.2@217.106,45.948 219.874,43.18 246.101,43.18 254.634,34.646 254.634,33.657 257.531,30.76 257.531,28.847 267.122,19.255 269.298,19.255 269.748,18.805 273.378,18.805 274.782,17.401 274.782,11.125 293.112,-7.205 296.316,-7.205 301.561,-12.451 301.561,-69.274 291.395,-79.441 291.395,-87.7 289.56,-89.535 289.56,-90.822 292.727,-93.988 292.727,-109.227 MX_RIGHT_1.2@292.774,-109.275
Net-(D_RSHIFT_1-Pad2): D_RSHIFT_1.2 MX_RSHIFT_1.2 | length 179.5
  F.Cu w0.25: D_RSHIFT_1.2@186.626,42.138 D_RSHIFT_1.2@186.626,43.338 D_RSHIFT_1.2@186.626,44.462 ; v1(228.365,-51.447) 246.182,-69.264 246.182,-88.463 247.531,-89.813 MX_RSHIFT_1.2@247.531,-90.225
  B.Cu w0.25: D_RSHIFT_1.2@186.626,42.138 189.07,39.694 189.07,36.776 193.509,32.337 216.29,32.337 222.772,25.855 222.772,16.668 219.527,13.422 219.527,10.063 229.1,0.49 229.1,-37.269 225.567,-40.802 225.567,-44.279 226.272,-44.984 226.272,-49.354 v1(228.365,-51.447) ; MX_RSHIFT_1.2@247.491,-90.804 247.491,-90.265 MX_RSHIFT_1.2@247.531,-90.225
Net-(D_S_1-Pad2): D_S_1.2 MX_S_1.2 | length 122.5
  F.Cu w0.25: D_S_1.2@49.466,42.138 D_S_1.2@49.466,43.338 D_S_1.2@49.466,44.462
  B.Cu w0.25: D_S_1.2@49.466,42.138 49.04,41.711 49.04,15.93 50.998,13.972 50.998,13.335 55.016,9.317 55.016,-4.681 55.032,-4.696 55.032,-7.554 55.299,-7.821 55.299,-33.779 53.168,-35.91 53.168,-46.217 53.93,-46.98 53.93,-48.958 56.654,-51.683 56.654,-63.045 58.465,-64.856 58.465,-68.636 59.515,-69.686 59.412,-71.175 59.412,-71.714 MX_S_1.2@59.372,-71.754
Net-(D_SEMIC_1-Pad2): D_SEMIC_1.2 MX_SEMIC_1.2 | length 161.6
  F.Cu w0.25: D_SEMIC_1.2@158.686,42.138 D_SEMIC_1.2@158.686,43.338 D_SEMIC_1.2@158.686,44.462
  B.Cu w0.25: D_SEMIC_1.2@158.686,42.138 158.686,43.218 162.544,47.076 164.257,47.076 164.949,46.383 164.949,43.5 165.726,42.724 170.561,42.724 177.988,35.297 179.372,35.297 183.401,31.269 186.577,31.269 195.858,21.988 201.879,21.988 202.895,20.972 202.895,9.978 209.576,3.298 209.576,-38.126 206.552,-41.149 206.552,-43.818 207.002,-44.268 207.002,-48.388 210.449,-51.834 210.449,-70.434 210.284,-70.598 210.284,-71.069 211.812,-71.175 211.772,-71.215 MX_SEMIC_1.2@211.772,-71.754
Net-(D_SLASH_1-Pad2): D_SLASH_1.2 MX_SLASH_1.2 | length 178.2
  F.Cu w0.25: D_SLASH_1.2@161.226,44.043 D_SLASH_1.2@161.226,45.243 D_SLASH_1.2@161.226,46.367 ; MX_SLASH_1.2@221.297,-90.804 221.297,-90.265 MX_SLASH_1.2@221.337,-90.225
  B.Cu w0.25: D_SLASH_1.2@161.226,44.043 164.157,41.112 167.961,41.112 179.822,29.251 183.871,29.251 192.9,20.221 194.147,20.221 197.163,17.205 197.163,9.098 197.163,8.938 206.774,-0.673 206.774,-36.904 204.455,-39.222 204.455,-44.142 201.729,-46.868 201.729,-81.876 203.033,-83.18 212.87,-83.18 219.15,-89.46 220.573,-89.46 MX_SLASH_1.2@221.337,-90.225
Net-(D_SPACE_1-Pad2): D_SPACE_1.2 MX_SPACE_1.2 | length 177.9
  F.Cu w0.25: D_SPACE_1.2@95.186,45.948 D_SPACE_1.2@95.186,47.148 D_SPACE_1.2@95.186,48.272
  B.Cu w0.25: D_SPACE_1.2@95.186,45.948 98.142,45.948 99.141,44.948 99.141,42.27 110.897,30.514 110.897,28.753 118.306,21.344 119.363,21.344 121.009,19.699 121.629,19.699 123.68,17.648 123.68,12.49 123.264,12.074 123.264,1.66 121.017,-0.587 121.017,-11.129 119.805,-12.341 119.805,-16.084 120.995,-17.275 120.995,-29.701 125.343,-34.048 125.343,-86.819 127.637,-89.113 127.637,-108.443 128.469,-109.275 128.429,-109.315 MX_SPACE_1.2@128.429,-109.854
Net-(D_T_1-Pad2): D_T_1.2 MX_T_1.2 | length 117.6
  F.Cu w0.25: D_T_1.2@87.566,40.233 D_T_1.2@87.566,41.433 D_T_1.2@87.566,42.557
  B.Cu w0.25: D_T_1.2@87.566,40.233 89.938,40.233 99.556,30.615 103.64,30.615 112.673,21.581 117.379,16.876 119.062,16.876 120.341,15.597 120.341,11.697 118.979,10.335 118.979,7.637 116.45,5.107 116.45,-34.771 111.302,-39.92 111.302,-50.035 111.903,-50.636 111.801,-52.125 111.801,-52.664 MX_T_1.2@111.761,-52.704
Net-(D_TAB_1-Pad2): D_TAB_1.2 MX_TAB_1.2 | length 98
  F.Cu w0.25: D_TAB_1.2@11.367,40.233 D_TAB_1.2@11.367,41.433 D_TAB_1.2@11.367,42.557
  B.Cu w0.25: D_TAB_1.2@11.367,40.233 12.076,39.523 12.076,-10.356 10.545,-11.887 10.545,-16.248 12.073,-17.776 12.073,-29.64 10.525,-31.188 10.525,-50.862 11.787,-52.125 11.747,-52.165 MX_TAB_1.2@11.747,-52.704
Net-(D_TILDE_1-Pad2): D_TILDE_1.2 MX_TILDE_1.2 | length 76.4
  F.Cu w0.25: MX_TILDE_1.2@6.985,-33.654 6.985,-33.115 MX_TILDE_1.2@7.025,-33.075 ; D_TILDE_1.2@8.826,38.328 D_TILDE_1.2@8.826,39.528 D_TILDE_1.2@8.826,40.652
  B.Cu w0.25: MX_TILDE_1.2@7.025,-33.075 7.128,-31.586 7.025,-31.484 7.025,-28.894 5.45,-27.319 5.45,-10.647 6.335,-9.762 6.335,15.25 8.826,17.741 D_TILDE_1.2@8.826,38.328
Net-(D_U_1-Pad2): D_U_1.2 MX_U_1.2 | length 111.9
  F.Cu w0.25: D_U_1.2@115.506,40.233 D_U_1.2@115.506,41.433 D_U_1.2@115.506,42.557 ; v1(137.184,-38.03) 137.184,-40.831 148.372,-52.019 MX_U_1.2@149.901,-52.125
  B.Cu w0.25: D_U_1.2@115.506,40.233 116.934,40.233 137.024,20.143 137.024,14.01 136.081,13.067 136.081,-36.927 v1(137.184,-38.03) ; MX_U_1.2@149.861,-52.704 149.861,-52.165 MX_U_1.2@149.901,-52.125
Net-(D_UP_1-Pad2): D_UP_1.2 MX_UP_1.2 | length 173.2
  F.Cu w0.25: D_UP_1.2@199.326,42.138 D_UP_1.2@199.326,43.338 D_UP_1.2@199.326,44.462 ; v1(245.711,-22.151) 257.242,-33.682 257.242,-40.182 266.173,-49.113 266.173,-53.931 272.375,-60.133 272.375,-88.875 MX_UP_1.2@273.724,-90.225
  B.Cu w0.25: D_UP_1.2@199.326,42.138 200.799,42.138 206.95,35.986 217.054,35.986 231.61,21.431 231.938,21.431 234.17,19.199 234.17,14.441 245.849,2.761 245.849,-22.012 v1(245.711,-22.151) ; MX_UP_1.2@273.684,-90.804 273.684,-90.265 MX_UP_1.2@273.724,-90.225
Net-(D_V_1-Pad2): D_V_1.2 MX_V_1.2 | length 167.1
  F.Cu w0.25: D_V_1.2@79.947,44.043 D_V_1.2@79.947,45.243 D_V_1.2@79.947,46.367 ; MX_V_1.2@106.998,-90.804 106.998,-90.265 MX_V_1.2@107.037,-90.225
  B.Cu w0.25: D_V_1.2@79.947,44.043 79.947,41.806 84.875,36.878 92.656,36.878 100.183,29.351 104.267,29.351 117.54,16.077 119.202,16.077 119.891,15.389 119.891,11.883 118.529,10.522 118.529,7.823 114.948,4.242 114.948,-10.902 114.223,-11.627 114.223,-13.563 114.138,-13.649 114.138,-13.707 113.776,-14.068 113.776,-14.45 113.772,-14.454 113.772,-35.538 112.731,-36.58 112.731,-37.217 110.159,-39.788 110.159,-42.169 106.99,-45.339 106.99,-88.586 107.14,-88.736 MX_V_1.2@107.037,-90.225
Net-(D_W_1-Pad2): D_W_1.2 MX_W_1.2 | length 100.3
  F.Cu w0.25: D_W_1.2@46.926,40.233 D_W_1.2@46.926,41.433 D_W_1.2@46.926,42.557
  B.Cu w0.25: D_W_1.2@46.926,40.233 48.589,38.57 48.589,1.11 54.581,-4.882 54.581,-7.966 54.848,-8.233 54.848,-25.287 54.377,-25.758 54.377,-33.55 52.696,-35.231 52.696,-46.553 53.301,-47.158 53.301,-50.775 54.65,-52.125 54.65,-52.664 MX_W_1.2@54.61,-52.704
Net-(D_X_1-Pad2): D_X_1.2 MX_X_1.2 | length 147.8
  F.Cu w0.25: D_X_1.2@52.006,44.043 D_X_1.2@52.006,45.243 D_X_1.2@52.006,46.367 ; MX_X_1.2@68.897,-90.804 68.937,-90.764 MX_X_1.2@68.937,-90.225
  B.Cu w0.25: D_X_1.2@52.006,44.043 52.006,39.784 57.477,34.314 57.477,-36.967 54.128,-40.315 54.128,-45.527 54.831,-46.229 54.831,-48.585 57.661,-51.415 57.661,-62.459 59.404,-64.202 59.404,-67.816 61.506,-69.919 61.506,-84.216 67.409,-90.119 MX_X_1.2@68.937,-90.225
Net-(D_Y_1-Pad2): D_Y_1.2 MX_Y_1.2 | length 111.4
  F.Cu w0.25: D_Y_1.2@102.806,40.233 D_Y_1.2@102.806,41.433 D_Y_1.2@102.806,42.557
  B.Cu w0.25: D_Y_1.2@102.806,40.233 108.226,40.233 130.783,17.676 130.783,17.357 131.38,16.76 131.38,-31.142 129.849,-32.674 129.849,-49.532 130.299,-49.982 130.953,-50.636 130.851,-52.125 130.811,-52.165 MX_Y_1.2@130.811,-52.704